# Allegro board TIDA-01606_HV_CARDE4_SCH.brd
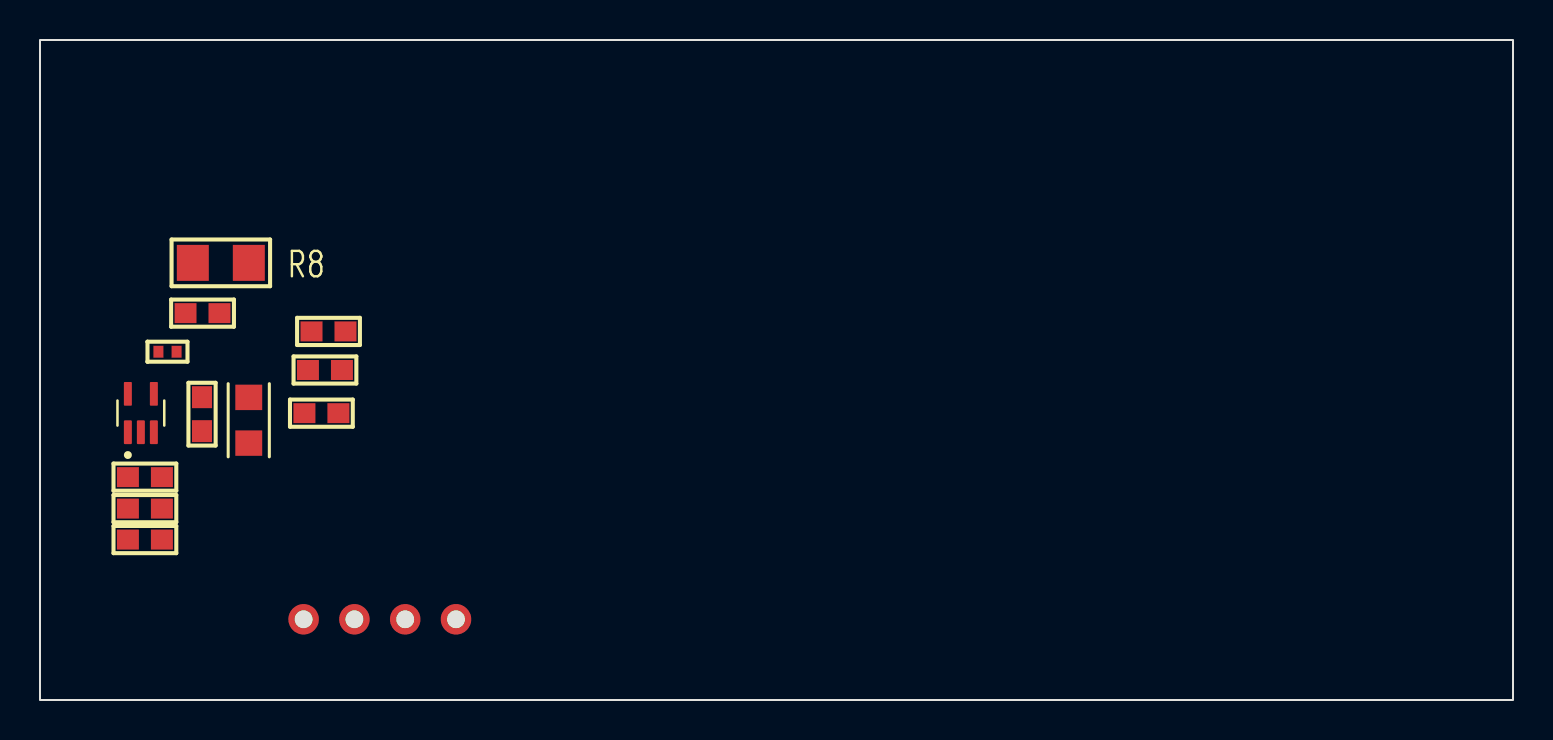
[diagram p0: board, top side]
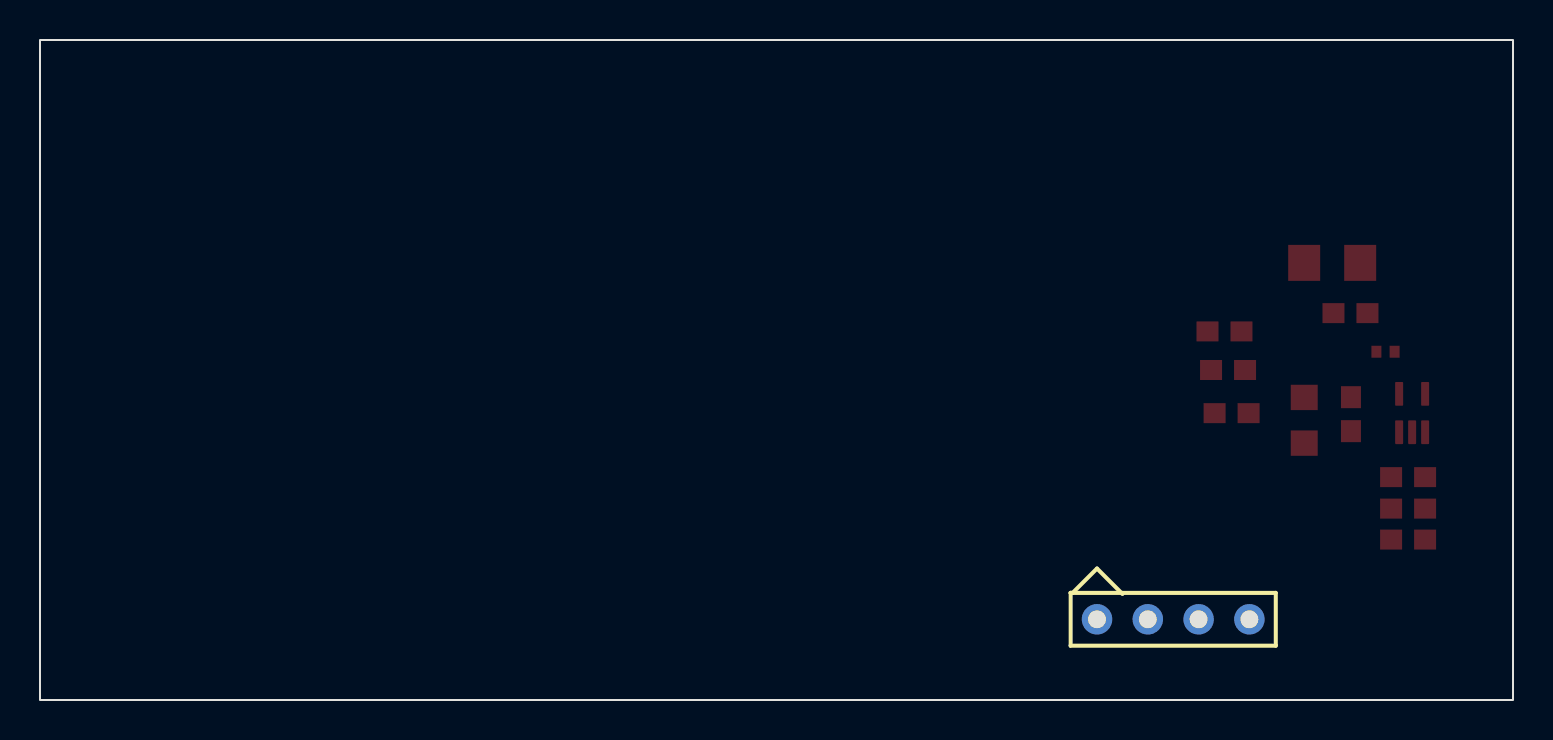
[diagram p1: board, bottom side, seen from below]

Outline 73.66 x 33.02 mm; copper layers: TOP, BOTTOM. Coordinates in mm from the lower left corner of the outline.
Outline path: rectangle 0,0 73.66,33.02

## Design rules (mm)
constraint set DEFAULT: min track width 0.127

## Placement (name value [footprint] x y rotation side)
C1  Ele 10u 10V 105C  [TAJA_AVX]  10.44 14 270 top
C2  0.1u 0603 50V  [RES0603]  8.1 14.3 270 top
C4  0.1uF 0603 50V  [RES0603]  14.25 16.51 180 top
C5  0.1u 0603 50V  [RES0603]  5.25 9.58 180 top
J1  61300411021  [SIP4_RUP]  20.8 4.04 90 bottom
R1  0E 0603 1%  [RES0603]  14.07 14.35 0 top
R2  56K 0603 5%  [RES0603]  5.25 11.15 0 top
R3  47K 0603 5%  [RES0603]  8.13 19.35 180 top
R5  56K 0603 5%  [RES0603]  5.25 8.03 180 top
R6  56K 0402 5%  [RES0402]  6.38 17.42 180 top
R7  0E 0603 1%  [RES0603]  14.43 18.44 180 top
R8  47K 0603 5%  [SNPD1206_MODIFIED]  9.04 21.87 0 top
U1  TI-TPS22944DCK5  [SOT65P210X110-5N]  5.04 14.36 90 top

## Library data of the parts
C1 = CAP: User Part Number: PN; Tolerance: TOL; room: 24Vcc3_smps
C2 C4 C5 = CAP NP: room: control_smps
J1 = HEADER 4_0
R1-R3 R5-R8 = RESISTOR: room: control_smps
U1 = DM3AT-SF-PEJM5_0

## Footprints (pads in the part's own frame, mm; a bottom-side part is the same pattern mirrored in y, then rotated)
RES0402
  rect 0.5x0.6 smd: 1(-0.455,0) 2(0.455,0)
RES0603
  rect 1.1x1 smd: 1(-0.85,0) 2(0.85,0)
SIP4_RUP
  round 1.524 hole 0.889: 1(0,0) 2(0,-2.54) 3(0,-5.08) 4(0,-7.62)
SNPD1206_MODIFIED
  rect 1.6x1.8 smd: 1(-1.4,0) 2(1.4,0)
SOT65P210X110-5N
  custom 1.19x0.4 smd: 1(-0.96,0.65) 2(-0.96,0) 3(-0.96,-0.65) 4(0.96,-0.65) 5(0.96,0.65)
TAJA_AVX
  rect 1.269x1.346 smd: 1(-1.143,0) 2(1.143,0)

## Nets
3.3V: C1.1 C2.1 J1.3 R3.1 U1.5
3.3V_LS: C5.1 R2.2 R5.1
5V: J1.1 R1.1
0: C1.2 C2.2 C4.2 C5.2 J1.4 R5.2 R8.2 U1.2
VDC_SEN: J1.2
N14282127: R2.1 U1.1(VOUT)
N14282426: R6.2 U1.4
N14282456: R3.2 R6.1 R8.1
N14283151: C4.1 R1.2 R7.1
N14283155: R7.2

Pads without a net: U1 3
